# EAGLE board My board_6 (EAGLE 7.6.0)
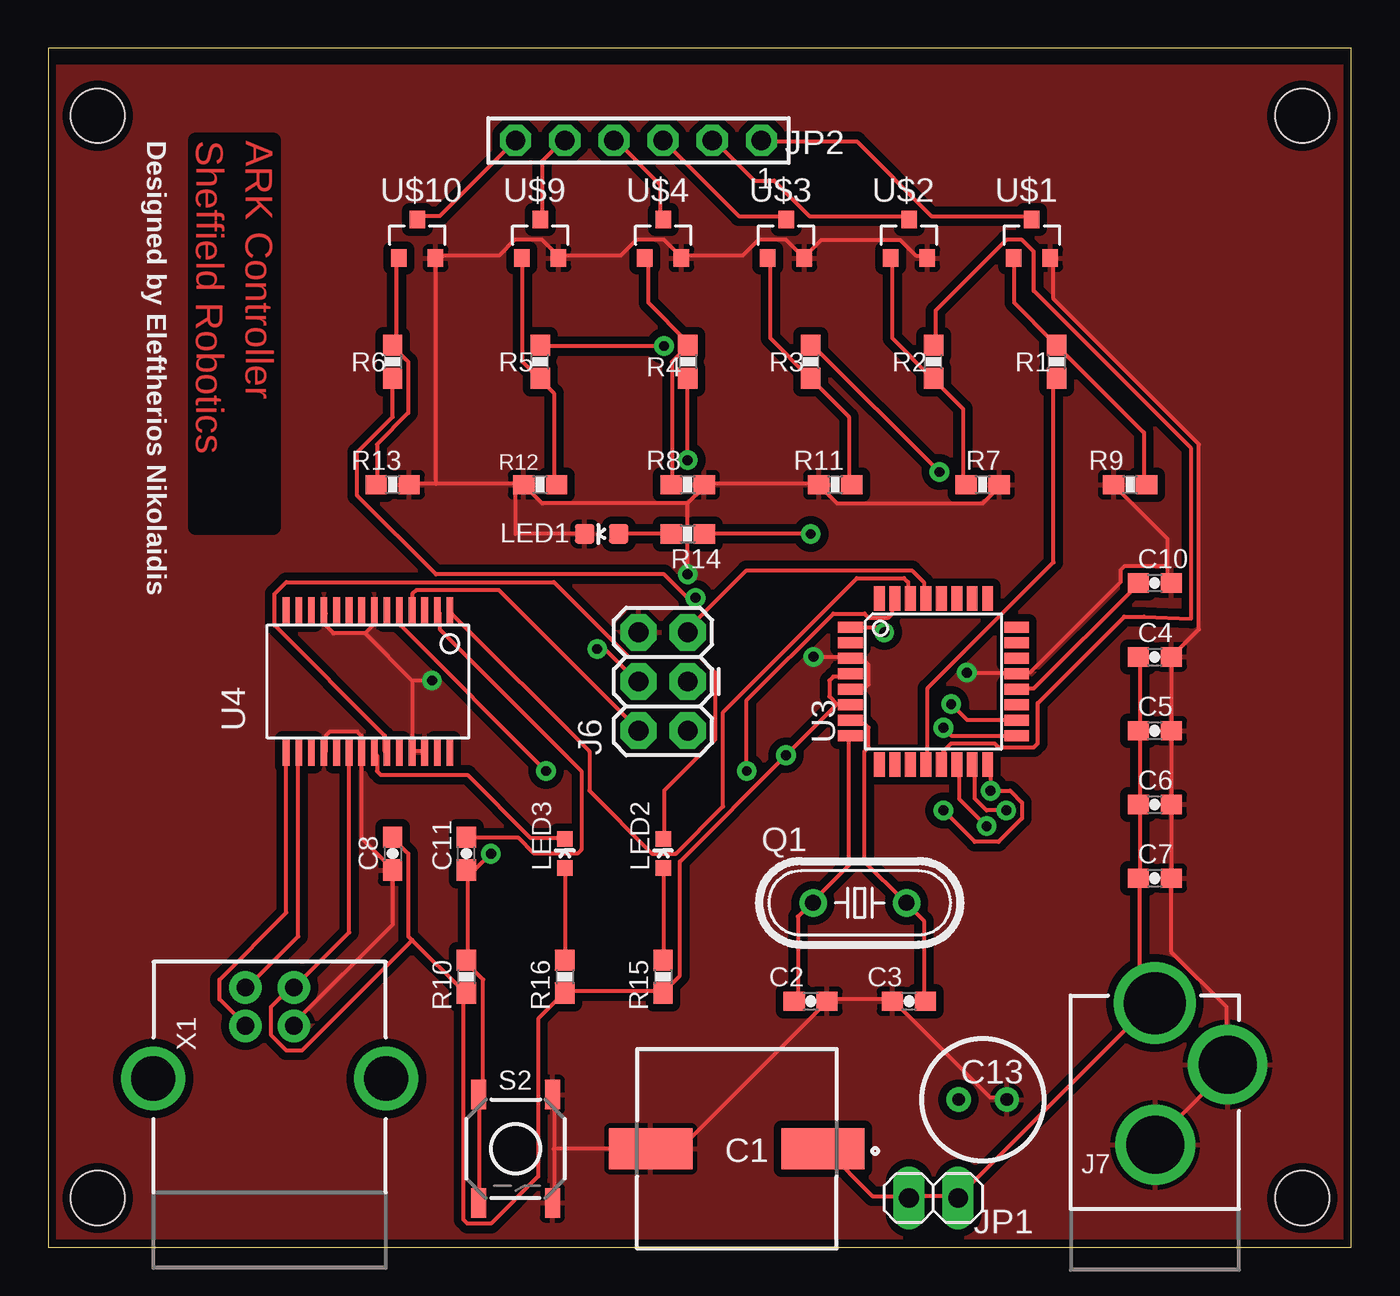
[diagram p0: board, top side]
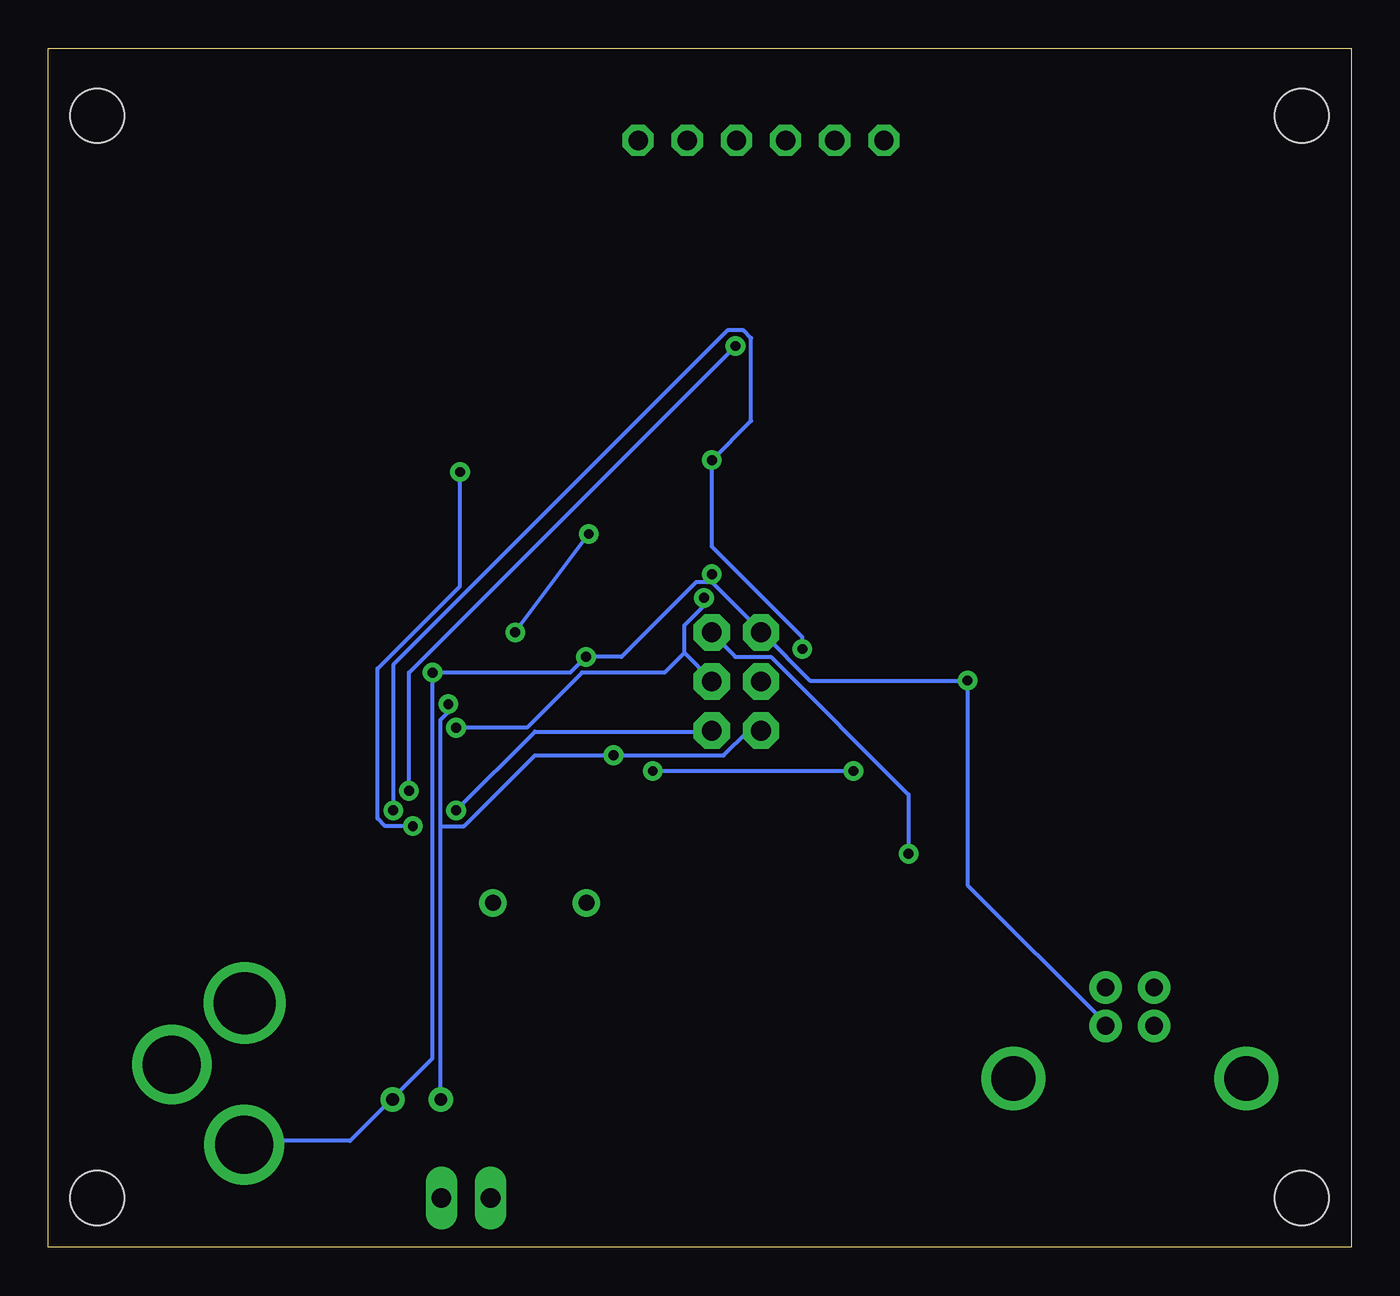
[diagram p1: board, bottom side, seen from below]

Size 67.29 x 61.9 mm. Coordinates in mm from the lower left corner, seen from the top.
Outline: 0,0 67.29,0 67.29,61.9 0,61.9 0,0
Copper layers (1*16): Top 0.035mm / dielectric 1.5mm / Bottom 0.035mm
Design rules "SparkFun": minimum track width 8mil, minimum drill 20mil, track to track 8mil, track to pad 8mil, pad to pad 8mil, via to via 8mil, smd to smd 8mil, copper to edge 10mil, drill to drill 8mil, minimum pad ring 12mil, minimum via ring 10mil, stop-mask expansion 4mil, vias tented up to drill 25mil, thermal gap 10mil
Net classes: 1 power: width 0.254 mm
Holes 2.8 mm at 2.54,58.42 64.77,58.42 64.77,2.54 2.54,2.54

## Footprints (pad centres in the part's own frame; a part is rotated, then mirrored left to right if it is on the bottom)
ALUMINUM-ELECTROLYTIC-CAPACITO = smd 4.3 x 2.1: 1 -4.45,0; 2 4.45,0
0603-CAP = smd 1.1 x 1: 1 -0.85,0; 2 0.85,0
ECEA1HKS100B = drill 0.65 pad 1.15: 1 -1.25,0; 2 1.25,0
2X3 = drill 1.016 pad 1.88 octagon: 1 0,0; 2 0,2.54; 3 2.54,0; 4 2.54,2.54; 5 5.08,0; 6 5.08,2.54
POWER_JACK_PTH_LOCK = drill 2.997 pad 4.115: GND 0.025,6.557; GNDBREAK 3.762,10.7 | drill 3.2 pad 4.115: PWR 0,13.878
1X02 = drill 1.016 long: 1 -1.27,0; 2 1.27,0
TSW-106-02-S-S = drill 1 pad 1.5 octagon: 1 6.35,0; 2 3.81,0; 3 1.27,0; 4 -1.27,0; 5 -3.81,0; 6 -6.35,0
LED-0603 = smd 1 x 1: A 0,-0.877; C 0,0.877
LED-0603' = smd 0.8 x 0.8: A 0,-0.75; C 0,0.75
HC49/S = drill 0.813: 1 -2.413,0; 2 2.413,0
0603-RES = smd 1.1 x 1: 1 -0.85,0; 2 0.85,0
TACTILE-SWITCH-SMD-ALT01 = smd 1.524 x 0.762: 1 -2.794,1.905; 2 2.794,1.905; 3 -2.794,-1.905; 4 2.794,-1.905
TQFP32-08 = smd 1.27 x 0.559: 1 -4.293,2.8; 2 -4.293,2; 3 -4.293,1.2; 4 -4.293,0.4; 5 -4.293,-0.4; 6 -4.293,-1.2; 7 -4.293,-2; 8 -4.293,-2.8; 17 4.293,-2.8; 18 4.293,-2; 19 4.293,-1.2; 20 4.293,-0.4; 21 4.293,0.4; 22 4.293,1.2; 23 4.293,2; 24 4.293,2.8 | smd 0.559 x 1.27: 9 -2.8,-4.293; 10 -2,-4.293; 11 -1.2,-4.293; 12 -0.4,-4.293; 13 0.4,-4.293; 14 1.2,-4.293; 15 2,-4.293; 16 2.8,-4.293; 25 2.8,4.293; 26 2,4.293; 27 1.2,4.293; 28 0.4,4.293; 29 -0.4,4.293; 30 -1.2,4.293; 31 -2,4.293; 32 -2.8,4.293
SSOP28DB = smd 0.348 x 1.397: 1 -4.225,-3.656; 2 -3.575,-3.656; 3 -2.925,-3.656; 4 -2.275,-3.656; 5 -1.625,-3.656; 6 -0.975,-3.656; 7 -0.325,-3.656; 8 0.325,-3.656; 9 0.975,-3.656; 10 1.625,-3.656; 11 2.275,-3.656; 12 2.925,-3.656; 13 3.575,-3.656; 14 4.225,-3.656; 15 4.225,3.656; 16 3.575,3.656; 17 2.925,3.656; 18 2.275,3.656; 19 1.625,3.656; 20 0.975,3.656; 21 0.325,3.656; 22 -0.325,3.656; 23 -0.975,3.656; 24 -1.625,3.656; 25 -2.275,3.656; 26 -2.925,3.656; 27 -3.575,3.656; 28 -4.225,3.656
SOT23-3 = smd 0.8 x 0.9: 1 -0.95,-1; 2 0.95,-1; 3 0,1
USB-B-PTH = drill 0.914 pad 1.676: D+ 0,1.25; D- 1.981,1.25; GND 0,-1.25; VBUS 1.981,-1.25 | drill 2.286: S1 -2.718,-6.02; S2 -2.718,6.02

## Placement (x,y rotation side)
C1  EEEFK1E471P  [ALUMINUM-ELECTROLYTIC-CAPACITO]  35.56,5.08 180 top
C2  22pf  [0603-CAP]  39.37,12.7 0 top
C3  22pf  [0603-CAP]  44.45,12.7 180 top
C4  0.1uF  [0603-CAP]  57.15,30.48 0 top
C5  0.1uF  [0603-CAP]  57.15,26.67 0 top
C6  0.1uF  [0603-CAP]  57.15,22.86 0 top
C7  0.1uF  [0603-CAP]  57.15,19.05 0 top
C8  0.1uF  [0603-CAP]  17.78,20.32 270 top
C10  0.1uF  [0603-CAP]  57.15,34.29 180 top
C11  0.1uF  [0603-CAP]  21.59,20.32 90 top
C13  10uF  [ECEA1HKS100B]  48.26,7.62 0 top
J6  ICSP  [2X3]  33.02,26.67 90 top
J7  POWER_JACK  [POWER_JACK_PTH_LOCK]  57.15,-1.27 0 top
JP1  [1X02]  45.72,2.54 180 top
JP2  [TSW-106-02-S-S]  30.48,57.15 0 top
LED1  Green  [LED-0603]  28.58,36.83 90 top
LED2  Red  [LED-0603']  31.75,20.32 0 top
LED3  Green  [LED-0603']  26.67,20.32 0 top
Q1  [HC49/S]  41.91,17.78 0 top
R1  100  [0603-RES]  52.07,45.72 270 top
R2  100  [0603-RES]  45.72,45.72 90 top
R3  100  [0603-RES]  39.37,45.72 90 top
R4  100  [0603-RES]  33.02,45.72 270 top
R5  100  [0603-RES]  25.4,45.72 90 top
R6  100  [0603-RES]  17.78,45.72 270 top
R7  47k  [0603-RES]  48.26,39.37 0 top
R8  47k  [0603-RES]  33.02,39.37 0 top
R9  47k  [0603-RES]  55.88,39.37 180 top
R10  10K  [0603-RES]  21.59,13.97 270 top
R11  47k  [0603-RES]  40.64,39.37 180 top
R12  47k  [0603-RES]  25.4,39.37 180 top
R13  47k  [0603-RES]  17.78,39.37 0 top
R14  1K  [0603-RES]  33.02,36.83 0 top
R15  1K  [0603-RES]  31.75,13.97 270 top
R16  1K  [0603-RES]  26.67,13.97 270 top
S2  Reset  [TACTILE-SWITCH-SMD-ALT01]  24.13,5.08 270 top
U3  ATMEGA328  [TQFP32-08]  45.72,29.21 0 top
U4  FT232RL  [SSOP28DB]  16.51,29.21 180 top
U$1  [SOT23-3]  50.8,52.07 0 top
U$2  [SOT23-3]  44.45,52.07 0 top
U$3  [SOT23-3]  38.1,52.07 0 top
U$4  [SOT23-3]  31.75,52.07 0 top
U$9  [SOT23-3]  25.4,52.07 0 top
U$10  N-CHANNEL-MOSFETs-BSS138  [SOT23-3]  19.05,52.07 0 top
X1  USB-B  [USB-B-PTH]  11.43,11.43 90 top

## Library data of the parts
C1 = SamacSys_Parts; DESCRIPTION: Aluminum Electrolytic Capacitors - SMD 470UF 25V FK SMD; HEIGHT: mm; MANUFACTURER_NAME: Panasonic; MANUFACTURER_PART_NUMBER: EEEFK1E471P; RS_PART_NUMBER: 5370528; SUPPLIER_NAME: RS
C2-C8 C10 C11 LED2 LED3 R1-R13 U3 U4 = SparkFun
C13 = SamacSys_Parts; DESCRIPTION: KS radial Al electrolytic cap,10uF 50V Panasonic 10F 50 V dc, Through Hole Aluminium Electrolytic Capacitor, 20%; HEIGHT: mm; MANUFACTURER_NAME: Panasonic; MANUFACTURER_PART_NUMBER: ECEA1HKS100; RS_PART_NUMBER: 9190461; SUPPLIER_NAME: RS
J6 = Connectors; PROD_ID: CONN-11566
J7 = Connectors; PROD_ID: CONN-08197; SF_ID: PRT-00119
JP1 = pinhead
JP2 = con-samtec
LED1 = LED
Q1 = crystal; OC_FARNELL: 1667008; OC_NEWARK: unknown
R14-R16 = Passives
S2 = Testing
U$1-U$4 U$9 U$10 = GeekAmmo; DATASHEET: http://www.fairchildsemi.com/ds/BS/BSS138.pdf; DIGIKEY: BSS138TR-ND; ELEMENT14: 2323154; URL: http://au.element14.com/fairchild-semiconductor/bss138/mosfet-n-ch-50v-220ma-sot-23/dp/2323154
X1 = Connectors; PROD_ID: CONN-08278

## Nets
AREF: C10.2 U3.20
DTR1: C11.2 U4.2
GND: C1.2 C2.2 C3.2 C4.2 C5.2 C6.2 C7.2 C8.2 C10.1 C13.2 J6.6 J7.GND J7.GNDBREAK LED1.C R7.2 R8.2 R9.2 R11.2 R12.2 R13.2 S2.1 S2.2 U3.3 U3.5 U3.21 U4.7 U4.11 U4.18 U4.21 U4.25 U4.26 U$1.2 U$2.2 U$3.2 U$4.2 U$9.2 U$10.2 X1.GND
N$1: JP2.5 U$9.3
N$2: JP2.6 U$10.3
N$3: R3.2 U3.14
N$4: R2.1 R7.1 U$2.1
N$5: R3.1 R11.1 U$3.1
N$6: R1.1 R9.1 U$1.1
N$7: R4.1 R8.1 U$4.1
N$8: R5.1 R12.1 U$9.1
N$9: R6.1 R13.1 U$10.1
N$10: C2.1 Q1.1 U3.8
N$26: C3.1 Q1.2 U3.7
N$27: LED2.A R15.1
N$28: LED3.A R16.1
N$30: U3.30 U4.1
N$31: R1.2 U3.12
N$32: R2.2 U3.13
N$34: J6.4 R4.2 U3.15
N$39: JP2.1 U$1.3
N$40: JP2.2 U$2.3
N$41: JP2.3 U$3.3
N$42: JP2.4 U$4.3
N$43: J6.1 R5.2 U3.16
N$44: C1.1 C4.1 C5.1 C6.1 C7.1 J7.PWR JP1.1 JP1.2
RESET: C11.1 J6.5 R10.1 S2.3 S2.4 U3.29
RXLED1: LED3.C U4.22
S$1: U3.31 U4.5
S$4: R14.2 U3.1
S$5: LED1.A R14.1
SCK1: J6.3 R6.2 U3.17
TXLED1: LED2.C U4.23
USB_D+1: U4.15 X1.D+
USB_D-1: U4.16 X1.D-
VCCIO: C8.1 C13.1 J6.2 R10.2 R15.2 R16.2 U3.4 U3.6 U3.18 U4.4 U4.20 X1.VBUS

## Tracks (layer width: path | path; a pad name or v marks a point on that pad's centre or on a via)
AREF
  Top 0.203: C10.2 56.19,34.14 50.9,28.85 50.09,28.85 U3.20
DTR1
  Top 0.203: C11.2 21.64,21.13 24.28,21.13 25.09,20.32 27.33,20.32 27.53,20.52 27.53,24.59 20.22,31.9 20.22,32.72 U4.2
GND  (via drill 0.51)
  Top 0.203: U$2.2 45.21,51.21 44.81,51.21 43.99,52.02 39.93,52.02 39.12,51.21 U$3.2 38.91,51.21 38.1,52.02 36.68,52.02 35.86,51.21 32.82,51.21 U$4.2 32.61,51.21 31.8,52.02 30.38,52.02 29.57,51.21 26.52,51.21 U$9.2 26.31,51.21 25.5,52.02 24.08,52.02 23.27,51.21 20.02,51.21 U$10.2 20.02,51 20.02,39.42 | 20.02,39.42 24.49,39.42 R12.2 | 20.02,39.42 18.8,39.42 R13.2 | R7.2 49.07,39.22 48.26,38.41 40.74,38.41 39.93,39.22 R11.2 39.73,39.42 34.04,39.42 R8.2 33.83,39.22 33.02,38.41 | 33.02,38.41 25.5,38.41 24.69,39.22 R12.2 | U4.18 14.33,25.6 14.33,26.42 14.53,26.62 15.95,26.62 16.15,26.42 16.15,25.6 U4.21 16.15,25.4 16.15,21.13 17.78,19.51 C8.2 17.78,16.66 12.7,11.58 X1.GND | 57.81,35.15 57.81,36.58 55.17,39.22 R9.2 | 57.81,35.15 57.81,34.34 C10.1 | 57.81,35.15 55.58,35.15 55.37,34.95 55.37,34.34 50.7,29.67 50.09,29.67 U3.21 49.89,29.67 v47.45,29.67 | 18.8,25.6 19.41,25.6 U4.26 | 16.36,31.7 14.73,31.7 14.33,32.11 14.33,32.72 U4.11 | 16.36,31.7 16.76,32.11 16.76,32.72 U4.7 | 18.8,29.26 18.8,25.6 | 16.36,31.7 18.8,29.26 | 18.8,25.6 U4.25 | U3.5 41.55,28.85 42.16,28.85 42.37,29.06 42.37,30.07 42.16,30.28 41.55,30.28 U3.3 41.35,30.48 v39.52,30.48 | v19.81,29.26 18.8,29.26 | 58.01,30.48 59.44,31.9 59.44,41.45 51.92,48.97 51.92,51 U$1.2 | 58.01,30.48 58.01,26.82 C5.2 58.01,26.62 58.01,22.96 C6.2 58.01,22.76 58.01,19.1 C7.2 58.01,18.9 58.01,15.24 60.86,12.39 60.86,9.55 J7.GNDBREAK 61.06,9.35 57.2,5.49 J7.GND | 58.01,30.48 C4.2 | 26.11,5.08 26.11,7.72 S2.1 | 26.11,5.08 26.11,2.44 S2.2 | 26.11,5.08 C1.2 32.61,5.08 40.13,12.6 C2.2 40.33,12.8 43.59,12.8 C3.2 43.79,12.6 48.67,7.72 49.48,7.72 C13.2
  Top 0.203: v33.02,34.75 33.02,38.41 | LED1.C 24.13,36.83 24.13,39.37 R12.2
  Bottom 0.203: 33.02,34.34 33.83,34.34 37.69,30.48 v39.52,30.48 40.33,29.67 v47.45,29.67 47.45,9.75 49.48,7.72 C13.2 49.68,7.52 51.71,5.49 57,5.49 J7.GND | 33.02,34.34 30.58,31.9 J6.6 30.38,31.7 27.94,29.26 v19.81,29.26 19.81,18.69 12.7,11.58 X1.GND | 33.02,34.34 v33.02,34.75
  pour Top (isolate 0.406): 67.31,0 0,0 0,60.96 67.31,60.96
N$1
  Top 0.203: U$9.3 25.5,53.24 25.5,56.08 26.52,57.1 JP2.5
N$2
  Top 0.203: JP2.6 20.22,53.24 19.2,53.24 U$10.3
N$3  (via drill 0.51)
  Top 0.203: v46.02,40.03 39.52,46.53 R3.2 | v48.46,21.74 47.04,23.17 47.04,24.79 U3.14
  Bottom 0.203: v46.02,40.03 46.02,34.14 50.29,29.87 50.29,22.15 49.89,21.74 v48.46,21.74
N$4
  Top 0.203: U$2.1 43.59,51 43.59,46.94 45.62,44.91 R2.1 45.82,44.7 47.24,43.28 47.24,39.42 R7.1
N$5
  Top 0.203: U$3.1 37.29,51 37.29,46.94 39.32,44.91 R3.1 39.52,44.7 41.35,42.88 41.35,39.42 R11.1
N$6
  Top 0.203: U$1.1 49.89,51 49.89,48.77 51.92,46.74 R1.1 52.12,46.53 56.59,42.06 56.59,39.42 R9.1
N$7
  Top 0.203: U$4.1 30.99,51 30.99,48.77 33.02,46.74 R4.1 33.02,46.53 32.21,45.72 32.21,39.42 R8.1
N$8
  Top 0.203: U$9.1 24.49,51 24.49,45.72 25.3,44.91 R5.1 25.5,44.7 26.11,44.09 26.11,39.42 R12.1
N$9
  Top 0.203: U$10.1 17.98,51 17.98,46.94 17.78,46.74 R6.1 17.78,46.53 18.59,45.72 18.59,43.08 16.97,41.45 16.97,39.42 R13.1
N$10
  Top 0.203: C2.1 38.71,12.8 38.71,17.07 39.32,17.68 Q1.1 39.52,17.88 41.35,19.71 41.35,26.21 U3.8
N$26
  Top 0.203: C3.1 45.21,12.8 45.21,16.87 44.4,17.68 Q1.2 44.2,17.88 42.16,19.91 42.16,25.6 42.37,25.81 42.37,26.82 42.16,27.03 41.55,27.03 U3.7
N$27
  Top 0.203: LED2.A 31.8,19.51 31.8,14.83 R15.1
N$28
  Top 0.203: LED3.A 26.72,19.51 26.72,14.83 R16.1
N$30
  Top 0.203: U3.30 44.4,33.53 44.4,34.34 44.2,34.54 41.76,34.54 34.85,27.64 34.85,22.76 32.41,20.32 31.19,20.32 27.94,23.57 27.94,25.6 20.83,32.72 U4.1
N$31
  Top 0.203: R1.2 51.92,44.7 51.92,35.36 45.41,28.85 45.41,24.99 U3.12
N$32
  Top 0.203: R2.2 45.82,46.74 45.82,48.36 49.48,52.02 50.29,52.02 50.9,51.41 50.9,49.38 59.03,41.25 59.03,32.46 56.59,32.56 55.58,32.56 51.11,28.09 51.11,26.01 50.9,25.81 49.07,25.81 48.87,26.01 46.63,26.01 46.23,25.6 46.23,24.99 U3.13
N$34  (via drill 0.51)
  Top 0.203: v33.02,40.64 R4.2 | v28.35,30.89 28.75,30.89 30.38,29.26 J6.4 | v49.48,22.56 48.46,22.56 47.85,23.17 47.85,24.79 U3.15
  Bottom 0.203: v28.35,30.89 28.35,31.5 33.02,36.17 v33.02,40.64 30.99,42.67 30.99,46.94 31.39,47.35 32.21,47.35 49.48,30.07 v49.48,22.56
N$39
  Top 0.203: U$1.3 50.7,53.24 45.62,53.24 41.76,57.1 36.88,57.1 JP2.1
N$40
  Top 0.203: U$2.3 44.4,53.24 39.32,53.24 37.49,55.07 36.47,55.07 34.44,57.1 JP2.2
N$41
  Top 0.203: JP2.3 35.66,53.24 38.1,53.24 U$3.3
N$42
  Top 0.203: U$4.3 31.6,53.24 31.6,54.86 29.36,57.1 JP2.4
N$43  (via drill 0.51)
  Top 0.203: v31.8,46.53 25.5,46.53 R5.2 | U3.16 48.67,24.79 v48.67,23.57 49.68,23.57 50.29,22.96 50.29,22.15 49.07,20.93 47.85,20.93 v46.23,22.56
  Bottom 0.203: v31.8,46.53 48.67,29.67 v48.67,23.57 | v46.23,22.56 42.16,26.62 33.02,26.62 J6.1
N$44
  Top 0.203: C1.1 40.13,5.08 42.57,2.64 44.4,2.64 JP1.2 44.6,2.64 46.84,2.64 JP1.1 47.04,2.64 57,12.6 J7.PWR 57,12.8 56.39,13.41 56.39,18.9 C7.1 56.39,19.1 56.39,22.76 C6.1 56.39,22.96 56.39,26.62 C5.1 56.39,26.82 56.39,30.48 C4.1
RESET  (via drill 0.51)
  Top 0.203: S2.4 22.25,2.44 22.25,7.72 S2.3 22.25,7.93 22.45,8.13 22.45,13.82 21.64,14.63 R10.1 21.64,14.83 21.64,19.3 C11.1 21.64,19.51 22.05,19.51 v22.86,20.32 | U3.29 45.21,33.53 45.21,34.34 44.6,34.95 36.07,34.95 33.02,31.9 J6.5
  Bottom 0.203: v22.86,20.32 22.86,23.37 29.97,30.48 31.8,30.48 33.02,31.7 J6.5
RXLED1
  Top 0.203: LED3.C 26.52,21.13 24.89,21.13 21.64,24.38 17.17,24.38 16.97,24.59 16.97,25.4 U4.22
S$1  (via drill 0.51)
  Top 0.203: v36.07,24.59 36.07,28.25 40.54,32.72 42.16,32.72 42.37,32.51 43.38,32.51 43.59,32.72 43.59,33.33 U3.31 | v25.7,24.59 18.19,32.11 18.19,32.72 U4.5
  Bottom 0.203: v25.7,24.59 v36.07,24.59
S$2  (via drill 0.5)
  other vias: 39.37,36.83
S$3  (via drill 0.5)
  other vias: 43.18,31.75
S$4  (via drill 0.5)
  Top 0.203: U3.1 42.92,32.01 v43.18,31.75 | v39.37,36.83 R14.2
  Bottom 0.203: v43.18,31.75 v39.37,36.83
S$5
  Top 0.203: R14.1 LED1.A
SCK1  (via drill 0.51)
  Top 0.203: R6.2 17.78,42.88 15.95,41.05 15.95,38.81 20.02,34.75 31.8,34.75 33.02,33.53 v33.43,33.53 | v46.23,26.82 46.63,26.42 49.89,26.42 U3.17
  Bottom 0.203: v33.43,33.53 33.43,33.12 34.44,32.11 34.44,30.68 | 34.44,30.68 33.02,29.26 J6.3 | v46.23,26.82 42.57,26.82 39.73,29.67 35.46,29.67 34.44,30.68
TXLED1
  Top 0.203: LED2.C 31.8,21.13 31.8,23.57 34.44,26.21 34.44,29.67 33.63,30.48 29.97,30.48 26.11,34.34 12.29,34.34 11.68,33.73 11.68,32.11 17.37,26.42 17.37,25.6 U4.23
USB_D+1
  Top 0.203: U4.15 12.29,25.4 12.29,17.27 8.84,13.82 8.84,12.8 10.06,11.58 X1.D+
USB_D-1
  Top 0.203: U4.16 12.9,25.4 12.9,16.05 10.26,13.41 X1.D-
VCCIO  (via drill 0.51)
  Top 0.203: U4.4 18.8,32.92 18.8,33.73 19,33.93 23.27,33.93 30.38,26.82 J6.2 | v46.63,28.04 47.45,27.23 49.89,27.23 U3.18 | 18.8,15.85 18.59,16.05 18.59,20.32 17.78,21.13 C8.1 | 18.8,15.85 21.44,13.21 R10.2 21.44,13 21.44,1.42 21.64,1.22 22.86,1.22 25.3,3.66 25.3,11.79 26.52,13 R16.2 26.72,13.21 31.6,13.21 R15.2 31.8,13.21 32.61,14.02 32.61,19.91 v38.1,25.4 40.74,28.04 | U4.20 15.55,25.4 15.55,16.26 12.7,13.41 X1.VBUS 12.5,13.41 11.48,12.39 11.48,10.97 12.29,10.16 13.11,10.16 18.8,15.85 | 40.74,28.04 41.35,28.04 U3.6 | 40.74,28.04 40.33,28.45 40.33,29.26 40.54,29.46 41.35,29.46 U3.4
  Bottom 0.203: v46.63,28.04 46.63,27.64 47.04,27.23 47.04,21.74 | 47.04,21.74 47.04,7.72 C13.1 | 47.04,21.74 45.82,21.74 42.16,25.4 v38.1,25.4 32.41,25.4 31.19,26.62 30.58,26.62 J6.2

## Text on the board
Top: ARK Controller / Sheffield Robotics
tPlace: Designed by Eleftherios Nikolaidis